# EAGLE board gps-tracker (EAGLE 7.2.0)
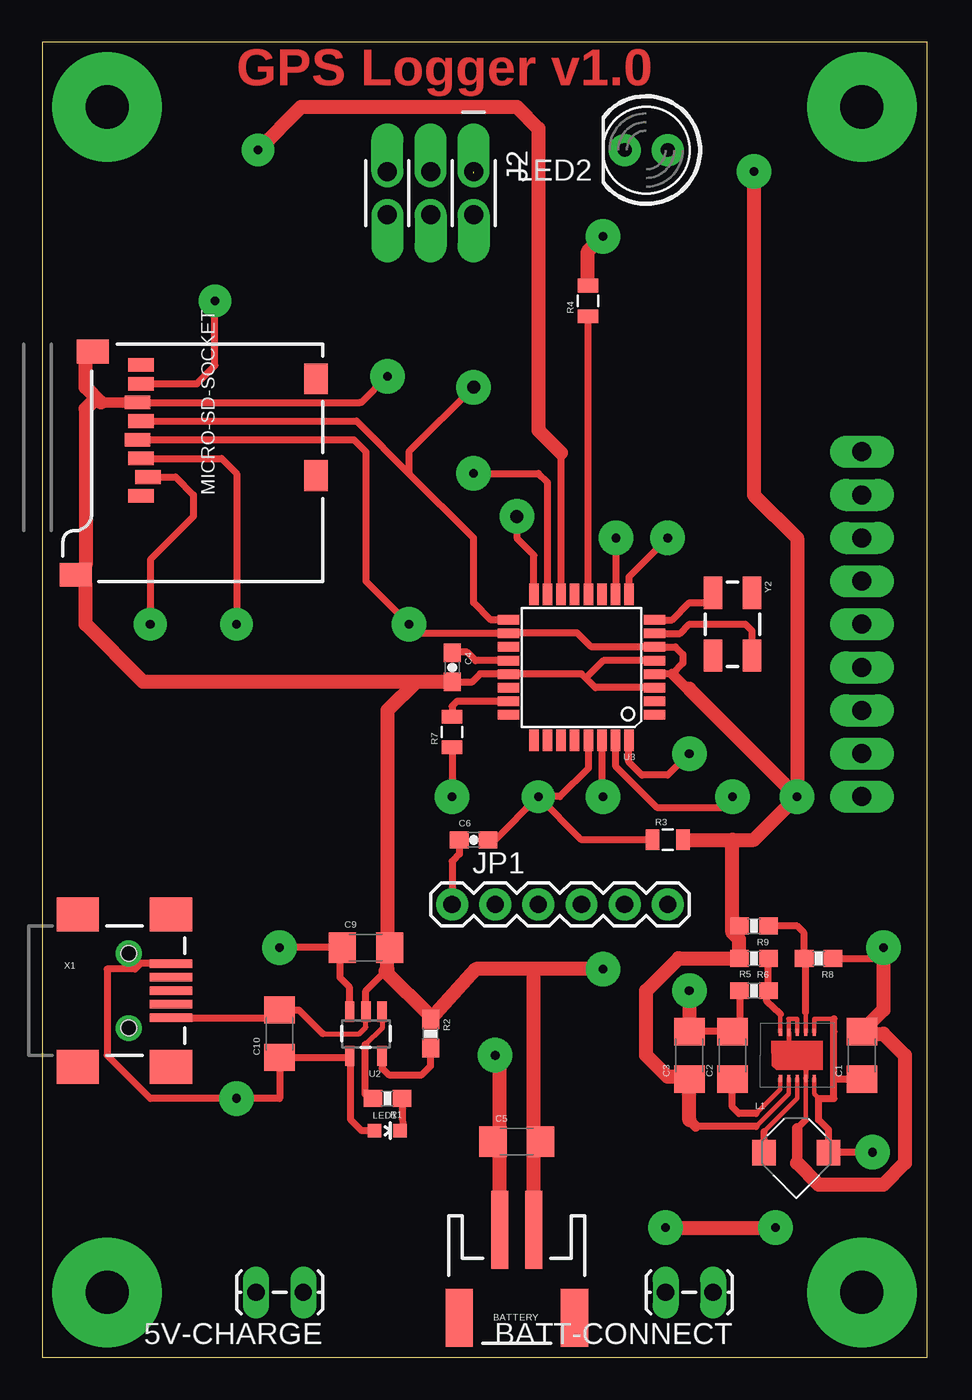
[diagram p0: board, top side]
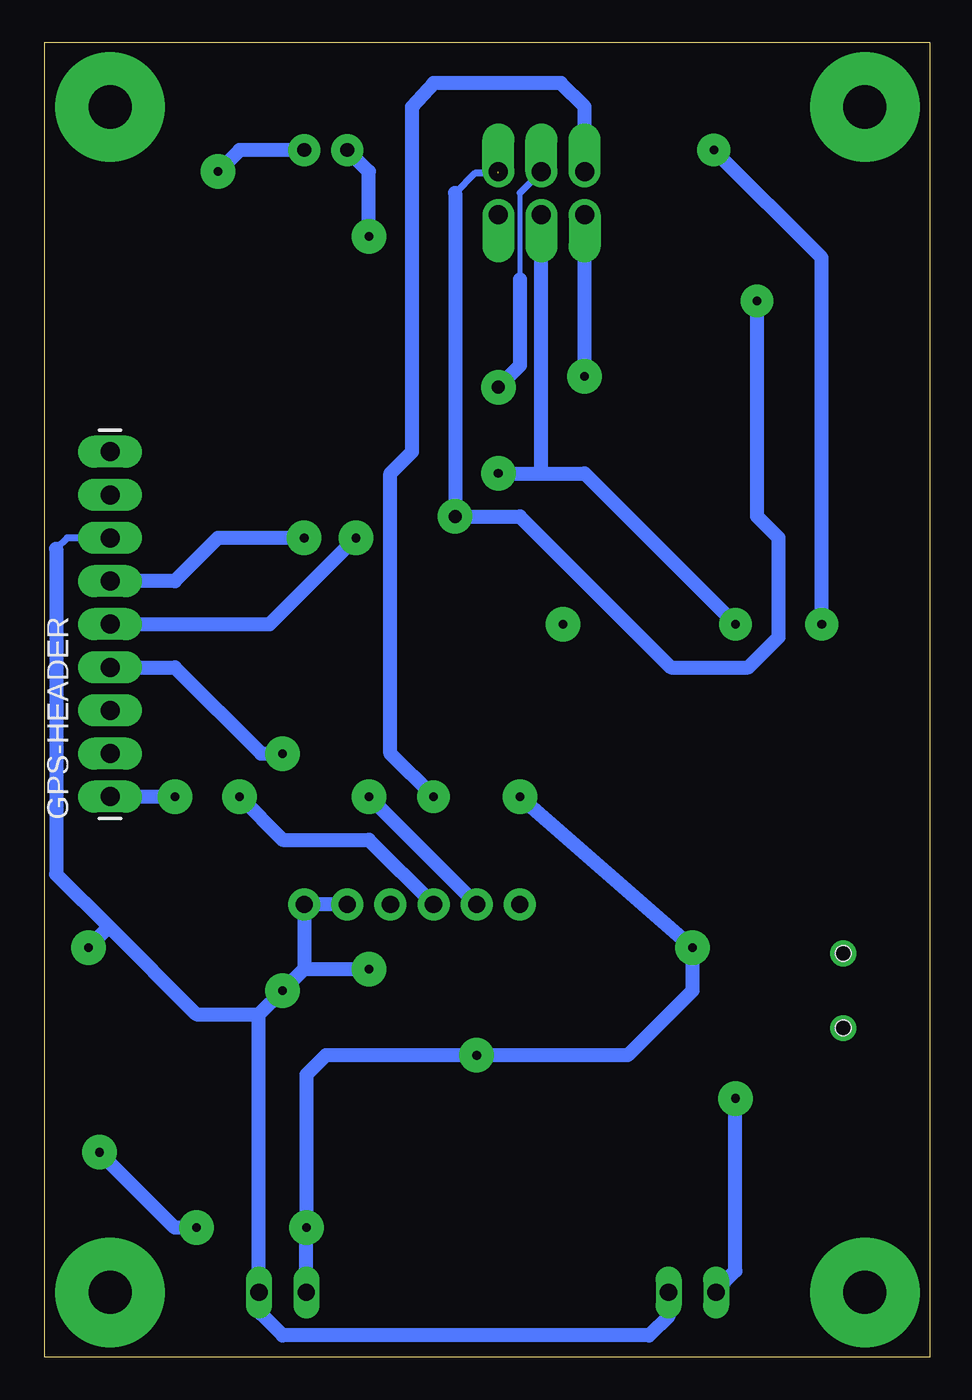
[diagram p1: board, bottom side, seen from below]

Size 52.12 x 77.46 mm. Coordinates in mm from the lower left corner, seen from the top.
Outline: 0,0 52.12,0 52.12,77.46 0,77.46 0,0
Copper layers (1*16): Top 0.035mm / dielectric 1.5mm / Bottom 0.035mm
Design rules "default": minimum track width 10mil, minimum drill 0.6mm, track to track 8mil, track to pad 8mil, pad to pad 8mil, via to via 8mil, smd to smd 8mil, copper to edge 40mil, drill to drill 8mil, minimum pad ring 10mil, minimum via ring 8mil, stop-mask expansion 4mil, vias tented up to drill 0mil, thermal gap 10mil

## Footprints (pad centres in the part's own frame; a part is rotated, then mirrored left to right if it is on the bottom)
1X02_LOCK_LONGPADS = drill 1.016 long: 1 -0.127,0; 2 2.667,0
JST-2-SMD = smd 1 x 4.6: 1 -1,-3.7; 2 1,-3.7 | smd 1.6 x 3.4: NC1 -3.4,1.5; NC2 3.4,1.5
1206 = smd 1.6 x 1.8: 1 -1.4,0; 2 1.4,0
0603-CAP = smd 1.1 x 1: 1 -0.85,0; 2 0.85,0
1X09_LONGPADS = drill 1.118 pad 1.88 long: 1 0,0; 2 2.54,0; 3 5.08,0; 4 7.62,0; 5 10.16,0; 6 12.7,0; 7 15.24,0; 8 17.78,0; 9 20.32,0
2X3_OFFSET = drill 1.118 pad 1.88 offset: 1 -2.54,-1.27; 2 -2.54,1.27; 3 0,-1.27; 4 0,1.27; 5 2.54,-1.27; 6 2.54,1.27
FTDI_BASIC = drill 1.016 pad 1.88: CTS 10.16,0; DTR 0,0; GND 12.7,0; RXI 2.54,0; TXO 5.08,0; VCC 7.62,0
CDRH3D28 = smd 1.4 x 1.5: 1 -1.95,-0.007; 2 1.849,-0.007
LED-0603 = smd 0.8 x 0.8: A 0,-0.75; C 0,0.75
LED5MM = drill 0.813 pad 1.88: A -1.27,0; K 1.27,0
MICRO-SD-SOCKET-PP = smd 0.8 x 1.5: 1 -8.94,10.7; 2 -7.84,10.3; 3 -6.74,10.7; 4 -5.64,10.9; 5 -4.54,10.7; 6 -3.44,10.9; 7 -2.34,10.7; 8 -1.24,10.7 | smd 1.8 x 1.4: CD1 -2.05,0.4; CD2 -7.75,0.4 | smd 1.4 x 1.9: GND1 -13.6,14.55; GND3 -0.45,13.55
0603-RES = smd 1.1 x 1: 1 -0.85,0; 2 0.85,0
0805 = smd 0.8 x 1.2: 1 -0.9,0; 2 0.9,0
SOT23-5 = smd 0.55 x 1.2: 1 -0.95,-1.3; 2 0,-1.3; 3 0.95,-1.3; 4 0.95,1.3; 5 -0.95,1.3
TQFP32-08 = smd 1.27 x 0.559: 1 -4.293,2.8; 2 -4.293,2; 3 -4.293,1.2; 4 -4.293,0.4; 5 -4.293,-0.4; 6 -4.293,-1.2; 7 -4.293,-2; 8 -4.293,-2.8; 17 4.293,-2.8; 18 4.293,-2; 19 4.293,-1.2; 20 4.293,-0.4; 21 4.293,0.4; 22 4.293,1.2; 23 4.293,2; 24 4.293,2.8 | smd 0.559 x 1.27: 9 -2.8,-4.293; 10 -2,-4.293; 11 -1.2,-4.293; 12 -0.4,-4.293; 13 0.4,-4.293; 14 1.2,-4.293; 15 2,-4.293; 16 2.8,-4.293; 25 2.8,4.293; 26 2,4.293; 27 1.2,4.293; 28 0.4,4.293; 29 -0.4,4.293; 30 -1.2,4.293; 31 -2,4.293; 32 -2.8,4.293
QFN-10 = smd 0.2 x 0.4: 1 -0.99,-1.35; 2 -0.49,-1.35; 3 0.01,-1.35; 4 0.51,-1.35; 5 1.01,-1.35; 6 1.01,1.35; 7 0.51,1.35; 8 0.01,1.35; 9 -0.49,1.35; 10 -0.99,1.35
USB-MINIB = smd 2.5 x 0.5: D+ 2.5,0; D- 2.5,0.8; GND 2.5,-1.6; ID 2.5,-0.8; VBUS 2.5,1.6 | smd 2.5 x 2: MTN1 -3,4.5; MTN2 2.5,4.5; MTN3 -3,-4.5; MTN4 2.5,-4.5 | hole 0.9: 0,2.2; 0,-2.2
CRYSTAL-SMD-5X3 = smd 1.9 x 1.1: 1 -1.85,-1.15; 2 1.85,-1.15; 3 1.85,1.15; 4 -1.85,1.15

## Placement (x,y rotation side)
5V-CHARGE  M02LOCK_LONGPADS  [1X02_LOCK_LONGPADS]  15.24,3.81 180 top
BATT-CONNECT  M02LOCK_LONGPADS  [1X02_LOCK_LONGPADS]  39.37,3.81 180 top
BATTERY  [JST-2-SMD]  27.94,3.81 180 top
C1  10uF  [1206]  48.26,17.78 90 top
C2  10uF  [1206]  40.64,17.78 90 top
C3  10uF  [1206]  38.1,17.78 90 top
C4  0.1uF  [0603-CAP]  24.13,40.64 270 top
C5  100uF  [1206]  27.94,12.7 0 top
C6  0.1uF  [0603-CAP]  25.4,30.48 0 top
C9  4.7uF  [1206]  19.05,24.13 0 top
C10  4.7uF  [1206]  13.97,19.05 90 top
GPS-HEADER  M09LONGPADS  [1X09_LONGPADS]  48.26,33.02 90 bottom
J2  AVR_SPI_PRG_6OFFSET_PADS  [2X3_OFFSET]  22.86,68.58 180 top
JP1  FTDI_BASICPTH  [FTDI_BASIC]  24.13,26.67 0 top
L1  2.2uH  [CDRH3D28]  44.45,12.06 0 top
LED1  [LED-0603]  20.32,13.34 270 top
LED2  [LED5MM]  35.56,71.12 180 top
MICRO-SD-SOCKET  USD-SOCKETNEW  [MICRO-SD-SOCKET-PP]  16.51,59.69 90 top
R1  250  [0603-RES]  20.32,15.24 180 top
R2  2k  [0603-RES]  22.86,19.05 270 top
R3  1k  [0805]  36.83,30.48 0 top
R4  150  [0805]  32.13,62.23 90 top
R5  150k  [0603-RES]  41.91,21.59 0 top
R6  840k  [0603-RES]  41.91,23.5 180 top
R7  470  [0805]  24.13,36.83 90 top
R8  250k  [0603-RES]  45.72,23.5 180 top
R9  2M5  [0603-RES]  41.91,25.4 180 top
U2  MCP73831  [SOT23-5]  19.05,19.05 180 top
U3  ATMEGA328P  [TQFP32-08]  31.75,40.64 180 top
U$1  TPS61200-WQFN  [QFN-10]  44.45,17.78 0 top
X1  USBSMD  [USB-MINIB]  5.08,21.59 0 top
Y2  [CRYSTAL-SMD-5X3]  40.64,43.18 270 top

## Library data of the parts
5V-CHARGE BATT-CONNECT GPS-HEADER J2 JP1 MICRO-SD-SOCKET = SparkFun-Connectors
BATTERY = SparkFun-Connectors; PROD_ID: CONN-08352
C1-C3 C9 C10 L1 LED1 R1-R9 U2 X1 = SparkFun
C4-C6 = SparkFun-Capacitors
LED2 = SparkFun-LED
U3 = SparkFun-DigitalIC; PROD_ID: IC-09069
U$1 = Synapseware
Y2 = SparkFun-FreqCtrl

## Nets
3.3V: C3.1 GPS-HEADER.1 LED2.A MICRO-SD-SOCKET.4 R3.2 R6.2 R9.2 U3.4 U3.6 U3.18 U$1.2
/RESET: C6.2 J2.5 R3.1 U3.29
BATT_LED: R4.1 U3.12
CD: MICRO-SD-SOCKET.CD1
DTR: C6.1 JP1.DTR
EN: GPS-HEADER.2
FB: R5.2 R6.1 U$1.10
GND: 5V-CHARGE.1 BATT-CONNECT.1 BATTERY.1 C1.2 C2.2 C3.2 C4.2 C5.2 C9.2 C10.2 GPS-HEADER.7 J2.6 JP1.CTS JP1.GND MICRO-SD-SOCKET.6 MICRO-SD-SOCKET.GND1 MICRO-SD-SOCKET.GND3 R2.1 R5.1 R8.1 U2.2 U3.3 U3.5 U3.21 U$1.4 U$1.8 U$1.9 X1.GND
GPS_EN_LED: U3.11
GPS_FIX: GPS-HEADER.4 U3.32
GPS_RX: GPS-HEADER.6 U3.9
GPS_TX: GPS-HEADER.5 U3.10
MISO: J2.1 MICRO-SD-SOCKET.7 U3.16
MOSI: J2.4 MICRO-SD-SOCKET.3 U3.15
N$1: R1.2 U2.1
N$2: L1.1 U$1.3
N$3: LED1.C R1.1
N$4: C2.1 U$1.1
N$5: LED2.K R4.2
N$6: R2.2 U2.5
N$9: J2.2
N$11: R7.2 U3.23
N$15: GPS-HEADER.3
N$16: C4.1 U3.20
N$24: U3.7 Y2.3
N$25: U3.8 Y2.1
PPS: GPS-HEADER.9
RXI: JP1.TXO U3.31
SCK: J2.3 MICRO-SD-SOCKET.5 U3.17
SD_CS: MICRO-SD-SOCKET.2 U3.14
TXO: JP1.RXI U3.30
UVLO: R8.2 R9.1 U$1.7
VBATT: BATT-CONNECT.2 BATTERY.2 C1.1 C5.1 C9.1 L1.2 R7.1 U2.3 U$1.5 U$1.6
VCC_DNU: JP1.VCC
VIN: GPS-HEADER.8
VUSB: 5V-CHARGE.2 C10.1 LED1.A U2.4 X1.VBUS

## Tracks (layer width: path | path; a pad name or v marks a point on that pad's centre or on a via)
3.3V  (via drill 0.51 pad 2.03)
  Top 0.254: U$1.2 43.96,15.51 42.04,13.59 | 37.97,16.51 C3.1
  Top 0.406: v44.45,33.02 44.32,33.02 | U3.4 36.02,40.26 37.08,40.26 37.72,40.89 37.72,41.4 37.28,41.84 U3.6 32.33,41.84 31.5,42.67 27.49,42.67 U3.18 22.13,42.64 v21.59,43.18 19.05,45.72 19.05,53.34 18.34,54.05 MICRO-SD-SOCKET.4 | 42.04,13.59 38.48,13.59 | 41.02,23.53 R6.2 | R9.2 40.64,25.4
  Top 0.61: 38.48,13.59 38.1,13.97 | 38.1,39.37 37.97,39.37 37.08,40.26
  Top 0.813: v41.91,69.85 41.91,50.8 44.45,48.26 v44.45,33.02 41.91,30.48 40.64,30.48 | 38.1,13.97 C3.1 | 40.64,30.48 40.64,25.4 40.64,25.02 41.02,24.64 41.02,23.53 | 37.97,16.51 36.83,16.51 35.56,17.78 35.56,21.59 37.47,23.5 R6.2 | R3.2 40.64,30.48 | 44.32,33.02 44.32,33.15 38.1,39.37
  Bottom 0.813: GPS-HEADER.1 v44.45,33.02 | LED2.A 40.64,71.12 v41.91,69.85
/RESET  (via drill 0.51 pad 1.93)
  Top 0.406: U3.29 32.15,34.69 30.48,33.02 v29.21,33.02 | R3.1 31.75,30.48 v29.21,33.02 | C6.2 26.67,30.48 v29.21,33.02
  Bottom 0.254: 20.32,69.75 J2.5
  Bottom 0.813: v29.21,33.02 31.75,35.56 31.75,52.07 30.48,53.34 30.48,73.66 29.21,75.06 21.72,75.06 20.32,73.66 J2.5
BATT_LED
  Top 0.406: U3.12 32.15,61.31 R4.1
DTR
  Top 0.406: C6.1 24.55,29.63 24.13,29.21 JP1.DTR
EN
  Bottom 0.254: 48.16,35.61 GPS-HEADER.2
FB
  Top 0.254: U$1.10 43.46,20.22 | 42.67,21.5 R5.2
  Top 0.406: 43.46,20.22 42.67,20.95 42.67,21.5 | R5.2 R6.1
GND  (via drill 0.51 pad 2.03)
  Top 0.254: 20.32,24.28 C9.2 | 48.39,19.05 C1.2 | 41.06,19.6 C2.2 | 44.96,13.97 U$1.4 | 43.96,18.52 44.96,17.53 | U$1.9 43.96,19.92 43.94,19.94 44.45,19.94 U$1.8
  Top 0.305: 16.51,19.05 18.67,19.05 19.05,19.43 U2.2 | U$1.9 43.96,18.52 | 44.96,17.53 U$1.4
  Top 0.406: X1.GND 13.51,19.99 C10.2 15.11,20.45 16.51,19.05 | U2.2 19.05,21.59 20.19,22.73 20.32,22.86 | 20.32,24 C9.2 20.32,24.26 | 22.86,20.07 R2.1 22.87,19.94 | 29.05,22.86 28.94,22.88 | U3.3 32.57,39.44 32,40.01 | 32,40.01 31.75,40.26 27.48,40.26 | 27.48,40.26 U3.21 | U3.5 33.04,41.04 32,40.01 | 27.48,40.26 25.78,40.26 25.27,39.75 24.17,39.75 C4.2 | v20.32,57.78 18.8,56.26 18.68,56.25 MICRO-SD-SOCKET.6 3.44,56.25 | 2.54,58.82 MICRO-SD-SOCKET.GND3 | 2.54,46.67 MICRO-SD-SOCKET.GND1 | 1.91,46.03 MICRO-SD-SOCKET.GND1 | C5.2 28.94,12.7 | R5.1 41.06,19.6 | 2.54,45.51 MICRO-SD-SOCKET.GND1 | 44.45,13.46 44.96,13.97 | C3.2 C2.2 38.23,19.18 38.1,19.05 | R8.1 48.9,23.5 v49.53,24.13
  Top 0.61: MICRO-SD-SOCKET.6 2.91,56.25 | 44.45,11.43 44.45,13.46
  Top 0.813: 20.32,22.86 20.32,24 | 22.86,20.07 20.19,22.73 | BATTERY.1 28.94,12.7 28.94,22.88 25.53,22.86 22.87,19.94 | v33.02,22.86 29.05,22.86 | 20.32,24.26 20.32,38.1 22.01,39.79 | C4.2 22.01,39.79 | 3.44,56.25 2.54,57.15 2.54,58.82 | 2.91,56.25 2.54,55.88 2.54,46.67 | 22.01,39.79 5.93,39.79 2.54,43.18 2.54,45.51 | v49.53,24.13 49.53,20.45 C1.2 | 44.45,11.43 45.72,10.16 49.53,10.16 50.8,11.43 50.8,17.78 49.53,19.05 48.39,19.05 | v38.1,21.59 C3.2
  Bottom 0.406: 39.37,2.54 39.37,3.68 BATT-CONNECT.1 | GPS-HEADER.7 50.8,48.26 51.44,47.62 | 48.26,25.27 48.39,25.27
  Bottom 0.813: BATT-CONNECT.1 39.5,20.19 | 5V-CHARGE.1 15.37,2.41 16.51,1.27 38.1,1.27 39.37,2.54 | 51.44,47.62 51.44,28.45 48.26,25.27 43.18,20.19 39.5,20.19 | 48.39,25.27 v49.53,24.13 | v20.32,57.78 J2.6 | 39.5,20.19 v38.1,21.59 36.83,22.86 | 36.83,22.86 v33.02,22.86 | JP1.CTS JP1.GND 36.83,22.86
GPS_FIX  (via drill 0.51 pad 2.03)
  Top 0.406: v38.1,35.56 36.83,34.29 35.31,34.29 34.54,35.05 U3.32
  Bottom 0.813: GPS-HEADER.4 44.45,40.64 39.37,35.56 v38.1,35.56
GPS_RX  (via drill 0.51 pad 2.03)
  Top 0.406: U3.9 34.55,45.98 v36.83,48.26
  Bottom 0.813: v36.83,48.26 41.91,48.26 44.45,45.72 GPS-HEADER.6
GPS_TX  (via drill 0.51 pad 2.03)
  Top 0.406: v33.78,48.26 33.78,44.97 U3.10
  Bottom 0.813: GPS-HEADER.5 38.86,43.18 v33.78,48.26
MISO  (via drill 0.51 pad 1.93, 0.76 pad 2.03)  (1 unrouted)
  Top 0.406: v27.94,49.53 27.94,48.26 28.95,47.25 U3.16 | MICRO-SD-SOCKET.7 9.09,57.35 10.16,58.42 v10.16,62.23
  Bottom 0.406: 25.4,69.75 26.77,69.75 27.94,68.58
  Bottom 0.813: 27.94,68.58 v27.94,49.53 24.13,49.53 15.24,40.64 10.67,40.64 8.89,42.42 8.89,48.26 10.16,49.53 v10.16,62.23
MOSI  (via drill 0.51 pad 1.93, 0.51 pad 2.03)
  Top 0.406: U3.15 29.75,51.53 29.21,52.07 v25.4,52.07 | MICRO-SD-SOCKET.3 10.55,52.95 11.43,52.07 v11.43,43.18
  Bottom 0.813: 22.86,52.07 20.32,52.07 v11.43,43.18 | v25.4,52.07 22.86,52.07 | 22.86,52.07 J2.4
N$1
  Top 0.305: U2.1 20,19.36 19.05,18.41
  Top 0.406: 19.43,15.25 R1.2 19.47,15.49 18.99,15.49 18.99,18.41 19.05,18.41
N$2
  Top 0.254: 42.5,13.29 44.45,15.24 U$1.3
  Top 0.406: L1.1 42.5,13.29
N$3
  Top 0.406: R1.1 21.22,13.48 LED1.C
N$4
  Top 0.254: U$1.1 43.46,15.77 42.04,14.35
  Top 0.406: 42.04,14.35 41.02,14.35 40.64,14.73 C2.1
N$5  (via drill 0.51 pad 2.03)
  Top 0.813: R4.2 32.13,65.15 v33.02,66.04
  Bottom 0.813: v33.02,66.04 33.02,69.85 LED2.K
N$6
  Top 0.406: U2.5 20,17.02 20.38,16.64 22.35,16.64 22.86,17.14 R2.2
N$7  (via drill 2.54 pad 6.45)
  other vias: 3.81,73.66
N$8  (via drill 2.54 pad 6.45)
  other vias: 48.26,73.66
N$10  (via drill 2.54 pad 6.45)
  other vias: 48.26,3.81
N$11
  Top 0.406: U3.23 24.42,38.64 24.13,38.35 R7.2
N$12  (via drill 2.54 pad 6.45)
  other vias: 3.81,3.81
N$13  (via drill 0.89 pad 1.52)
  other vias: 5.08,23.77
N$14  (via drill 0.89 pad 1.52)
  other vias: 5.08,19.38
N$16
  Top 0.406: U3.20 25.51,41.04 25.02,41.53 24.17,41.53 C4.1
N$24
  Top 0.406: U3.7 37.56,42.64 38.1,43.18 41.4,43.18 41.78,42.8 Y2.3
N$25
  Top 0.406: U3.8 37.09,43.44 38.1,44.45 39.42,44.45 Y2.1
RXI  (via drill 0.51 pad 2.03)
  Top 0.406: U3.31 33.75,34.83 36.2,32.38 40.01,32.38 v40.64,33.02
  Bottom 0.813: v40.64,33.02 38.1,30.48 33.02,30.48 JP1.TXO
SCK  (via drill 0.76 pad 2.03)
  Top 0.406: v25.4,57.15 21.59,53.34 21.59,52.07 | U3.17 26.41,43.44 25.4,44.45 25.4,48.26 21.59,52.07 | MICRO-SD-SOCKET.5 18.51,55.15 21.59,52.07
  Bottom 0.305: 24.13,68.58 24.13,63.5
  Bottom 0.406: J2.3 24.13,68.58
  Bottom 0.813: v25.4,57.15 24.13,58.42 24.13,63.5
SD_CS  (via drill 0.51 pad 1.93)
  Top 0.406: U3.14 30.55,53.27 | MICRO-SD-SOCKET.2 7.84,51.85 8.89,50.8 8.89,49.53 6.35,46.99 v6.35,43.18
  Top 0.813: v12.7,71.12 15.24,73.66 27.94,73.66 29.21,72.39 29.21,54.61 30.55,53.27
  Bottom 0.813: v6.35,43.18 6.35,64.77 v12.7,71.12
TXO  (via drill 0.51 pad 2.03)
  Top 0.406: U3.30 32.95,32.96 v33.02,33.02
  Bottom 0.813: v33.02,33.02 JP1.RXI
UVLO
  Top 0.254: U$1.7 44.96,20.32
  Top 0.406: R9.1 44.45,25.4 44.87,24.98 R8.2 44.96,23.41 44.96,20.32
VBATT  (via drill 0.51 pad 2.03)
  Top 0.254: 36.78,3.86 BATT-CONNECT.2 | U$1.5 45.46,15.5 45.72,15.24 | 46.61,19.94 45.47,19.94 U$1.6
  Top 0.406: C9.1 17.78,24.13 14.1,24.13 v13.97,24.13 | 17.78,24.26 C9.1 | 26.94,17.51 v26.67,17.78 | U2.3 18.1,21.78 17.53,22.35 17.53,24.01 C9.1 | C5.1 26.94,12.7 | 46.61,16.38 C1.1 | 46.61,16.38 46.61,15.24 45.72,15.24 45.72,13.97 46.3,13.39 L1.2 v48.9,12.06 | 46.61,16.38 46.61,19.18 46.61,19.94 | R7.1 v24.13,33.02
  Top 0.813: 26.94,17.51 26.94,12.7 BATTERY.2 | v36.7,7.62 v43.18,7.62
  Bottom 0.406: 14.1,24.26 v13.97,24.13
  Bottom 0.813: BATT-CONNECT.2 v36.7,7.62 36.7,16.64 35.56,17.78 v26.67,17.78 17.78,17.78 13.97,21.59 v13.97,24.13 | v24.13,33.02 14.1,24.26 | v43.18,7.62 44.45,7.62 v48.9,12.06
VUSB  (via drill 0.51 pad 2.03)
  Top 0.406: X1.VBUS 5.79,23.19 5.46,22.86 3.81,22.86 3.81,17.78 6.35,15.24 v11.43,15.24 13.97,15.24 C10.1 18,17.65 U2.4 18.16,17.69 18.16,13.97 18.8,13.34 LED1.A
  Bottom 0.406: 5V-CHARGE.2 12.57,3.94
  Bottom 0.813: 12.57,3.94 11.43,5.08 v11.43,15.24

## Text on the board
Top: GPS Logger v1.0